# EAGLE board CT_schematic (EAGLE 7.6.0)

Size 100 x 80 mm. Coordinates in mm from the lower left corner, seen from the top.
Outline: 0,0 100,0 100,80 0,80 0,0
Copper layers (1*16): Top 0.035mm / dielectric 1.5mm / Bottom 0.035mm
Design rules "default": minimum track width 10mil, minimum drill 24mil, track to track 8mil, track to pad 8mil, pad to pad 8mil, via to via 8mil, smd to smd 8mil, copper to edge 40mil, drill to drill 8mil, minimum pad ring 10mil, minimum via ring 8mil, stop-mask expansion 4mil, vias tented up to drill 0mil, thermal gap 10mil

## Footprints (pad centres in the part's own frame; a part is rotated, then mirrored left to right if it is on the bottom)
C0603 = smd 0.8 x 0.8: 1 -0.762,0; 2 0.762,0
C0402 = smd 0.5 x 0.5: 1 -0.508,0; 2 0.508,0
C1210 = smd 1.2 x 2.5: 1 -1.524,0; 2 1.524,0
EXV-9H = smd 3.505 x 1.676: 1 -2.857,0; 2 2.857,0
L0603 = smd 0.8 x 0.8: 1 -0.762,0; 2 0.762,0
L1210 = smd 1.2 x 2.5: 1 -1.524,0; 2 1.524,0
PJ-037B_PACKAGE = drill 3.7 square: 1 12,0 | drill 3.2 square: 2 6,0
R0603 = smd 0.8 x 0.8: 1 -0.762,0; 2 0.762,0
UFBGA100 = smd 0.28 x 0.28: A1 -2.75,2.75; A2 -2.25,2.75; A3 -1.75,2.75; A4 -1.25,2.75; A5 -0.75,2.75; A6 -0.25,2.75; A7 0.25,2.75; A8 0.75,2.75; A9 1.25,2.75; A10 1.75,2.75; A11 2.25,2.75; A12 2.75,2.75; B1 -2.75,2.25; B2 -2.25,2.25; B3 -1.75,2.25; B4 -1.25,2.25; B5 -0.75,2.25; B6 -0.25,2.25; B7 0.25,2.25; B8 0.75,2.25; B9 1.25,2.25; B10 1.75,2.25; B11 2.25,2.25; B12 2.75,2.25; C1 -2.75,1.75; C2 -2.25,1.75; C3 -1.75,1.75; C4 -1.25,1.75; C5 -0.75,1.75; C8 0.75,1.75; C9 1.25,1.75; C10 1.75,1.75; C11 2.25,1.75; C12 2.75,1.75; D1 -2.75,1.25; D2 -2.25,1.25; D3 -1.75,1.25; D10 1.75,1.25; D11 2.25,1.25; D12 2.75,1.25; E1 -2.75,0.75; E2 -2.25,0.75; E3 -1.75,0.75; E10 1.75,0.75; E11 2.25,0.75; E12 2.75,0.75; F1 -2.75,0.25; F2 -2.25,0.25; F11 2.25,0.25; F12 2.75,0.25; G1 -2.75,-0.25; G2 -2.25,-0.25; G11 2.25,-0.25; G12 2.75,-0.25; H1 -2.75,-0.75; H2 -2.25,-0.75; H3 -1.75,-0.75; H10 1.75,-0.75; H11 2.25,-0.75; H12 2.75,-0.75; J1 -2.75,-1.25; J2 -2.25,-1.25; J3 -1.75,-1.25; J10 1.75,-1.25; J11 2.25,-1.25; J12 2.75,-1.25; K1 -2.75,-1.75; K2 -2.25,-1.75; K3 -1.75,-1.75; K4 -1.25,-1.75; K5 -0.75,-1.75; K8 0.75,-1.75; K9 1.25,-1.75; K10 1.75,-1.75; K11 2.25,-1.75; K12 2.75,-1.75; L1 -2.75,-2.25; L2 -2.25,-2.25; L3 -1.75,-2.25; L4 -1.25,-2.25; L5 -0.75,-2.25; L6 -0.25,-2.25; L7 0.25,-2.25; L8 0.75,-2.25; L9 1.25,-2.25; L10 1.75,-2.25; L11 2.25,-2.25; L12 2.75,-2.25; M1 -2.75,-2.75; M2 -2.25,-2.75; M3 -1.75,-2.75; M4 -1.25,-2.75; M5 -0.75,-2.75; M6 -0.25,-2.75; M7 0.25,-2.75; M8 0.75,-2.75; M9 1.25,-2.75; M10 1.75,-2.75; M11 2.25,-2.75; M12 2.75,-2.75
SAMTEC_FTSH-105-01-L-DV-K = smd 0.762 x 2.794: 1 -2.54,-2.032; 2 -2.54,2.032; 3 -1.27,-2.032; 4 -1.27,2.032; 5 0,-2.032; 6 0,2.032; 7 1.27,-2.032; 8 1.27,2.032; 9 2.54,-2.032; 10 2.54,2.032
SSOP-16 = smd 1.981 x 0.356: 1 -2.464,2.223; 2 -2.464,1.587; 3 -2.464,0.953; 4 -2.464,0.318; 5 -2.464,-0.318; 6 -2.464,-0.953; 7 -2.464,-1.587; 8 -2.464,-2.223; 9 2.464,-2.223; 10 2.464,-1.587; 11 2.464,-0.953; 12 2.464,-0.318; 13 2.464,0.318; 14 2.464,0.953; 15 2.464,1.587; 16 2.464,2.223
182-009-MALE = drill 1.194 pad 1.524 octagon: 1 -5.537,10.923; 2 -2.769,10.923; 3 0,10.923; 4 2.769,10.923; 5 5.537,10.923; 6 -4.153,8.08; 7 -1.384,8.08; 8 1.384,8.08; 9 4.153,8.08 | hole 3.048: -12.446,9.501; 12.446,9.501
TDFN-8/6MM = smd 0.3 x 0.75: 1 0,0; 2 0.5,0; 3 1,0; 4 1.5,0; 5 1.5,3; 6 1,3; 7 0.5,3; 8 0,3
TSSOP20-I = smd 0.4 x 1.35: 1 -2.925,-2.875; 2 -2.275,-2.875; 3 -1.625,-2.875; 4 -0.975,-2.875; 5 -0.325,-2.875; 6 0.325,-2.875; 7 0.975,-2.875; 8 1.625,-2.875; 9 2.275,-2.875; 10 2.925,-2.875; 11 2.925,2.875; 12 2.275,2.875; 13 1.625,2.875; 14 0.975,2.875; 15 0.325,2.875; 16 -0.325,2.875; 17 -0.975,2.875; 18 -1.625,2.875; 19 -2.275,2.875; 20 -2.925,2.875
ABS07-32.768KHZ-7-T = smd 1.1 x 2.4: 1 -2.5,0; 2 0,0
ASFL1 = smd 1.7 x 1.5: 1 -1.27,-1.1; 2 1.27,-1.1; 3 1.27,1.1; 4 -1.27,1.1
WSON-8 = smd 0.3 x 0.6: 1 -0.75,0; 2 0.05,0; 3 0.85,0; 4 1.65,0; 5 1.65,3.8; 6 0.85,3.8; 7 0.05,3.8; 8 -0.75,3.8 | smd 3 x 2.6: PAD 0.45,1.9
SON-6 = smd 0.55 x 0.3: 1 -0.355,0.5 | smd 0.52 x 0.3: 2 -0.37,0; 3 -0.37,-0.5; 4 0.37,-0.5; 5 0.37,0; 6 0.37,0.5
SW_4-1437565-2 = smd 1.4 x 2.1: 1 -2.23,4.55; 2 -2.23,-4.55; 3 2.23,4.55; 4 2.23,-4.55
LGM67K-G1J2-24-Z = smd 0.8 x 1.4: A -2,0; C 0,0
NC7SZ125M5X = smd 1.3 x 0.7: 1 -1.3,0.95; 2 -1.3,0; 3 -1.3,-0.95; 4 1.3,-0.95; 5 1.3,0.95

## Placement (x,y rotation side)
C1  1e-07  [C0603]  -26.67,86.36 0 top  (outside the outline)
C2  1e-07  [C0603]  -30.48,86.36 0 top  (outside the outline)
C3  1e-07  [C0603]  -34.29,86.36 0 top  (outside the outline)
C4  1e-07  [C0603]  -38.1,86.36 0 top  (outside the outline)
C5  1e-07  [C0603]  -41.91,86.36 0 top  (outside the outline)
C6  4.7e-06  [C0603]  -19.05,86.36 0 top  (outside the outline)
C7  1e-07  [C0603]  -45.72,86.36 0 top  (outside the outline)
C8  1e-08  [C0603]  -49.53,86.36 0 top  (outside the outline)
C9  1e-06  [C0603]  -53.34,86.36 0 top  (outside the outline)
C10  1e-11  [C0402]  -38.1,91.44 0 top  (outside the outline)
C11  1e-11  [C0402]  -41.91,91.44 0 top  (outside the outline)
C12  1e-07  [C0402]  -45.72,91.44 0 top  (outside the outline)
C13  1e-06  [C0603]  -57.15,86.36 0 top  (outside the outline)
C14  1e-06  [C0603]  -60.96,86.36 0 top  (outside the outline)
C15  2.2e-07  [C0603]  -22.86,86.36 0 top  (outside the outline)
C16  1e-06  [C0603]  -64.77,86.36 0 top  (outside the outline)
C17  1e-06  [C0603]  -68.58,86.36 0 top  (outside the outline)
C18  1e-08  [C0402]  -49.53,91.44 0 top  (outside the outline)
C19  1e-07  [C0402]  -53.34,91.44 0 top  (outside the outline)
C20  1e-07  [C0402]  -57.15,91.44 0 top  (outside the outline)
C21  1e-07  [C0402]  -60.96,91.44 0 top  (outside the outline)
C22  1e-07  [C0402]  -64.77,91.44 0 top  (outside the outline)
C23  1e-07  [C0402]  -68.58,91.44 0 top  (outside the outline)
C24  1e-07  [C0402]  -72.39,91.44 0 top  (outside the outline)
C25  1e-08  [C0402]  -76.2,91.44 0 top  (outside the outline)
C26  1e-08  [C0402]  -80.01,91.44 0 top  (outside the outline)
C27  1e-05  [C1210]  -71.12,72.39 0 top  (outside the outline)
C28  1e-05  [C1210]  -77.47,72.39 0 top  (outside the outline)
C29  1e-07  [C0402]  -83.82,91.44 0 top  (outside the outline)
C30  0.0001  [EXV-9H]  -17.78,73.66 0 top  (outside the outline)
C31  0.0001  [EXV-9H]  -29.21,73.66 0 top  (outside the outline)
C32  1e-08  [C0402]  -15.24,96.52 0 top  (outside the outline)
C33  1e-08  [C0402]  -19.05,96.52 0 top  (outside the outline)
F1  240.0  [L0603]  -72.39,86.36 0 top  (outside the outline)
I1  1e-05  [L1210]  -16.51,81.28 0 top  (outside the outline)
J1  PJ-037B  [PJ-037B_PACKAGE]  -27.94,50.8 0 top  (outside the outline)
R2  1000.0  [R0603]  -76.2,86.36 0 top  (outside the outline)
R4  4700.0  [R0603]  -80.01,86.36 0 top  (outside the outline)
R5  2200.0  [R0603]  -15.24,91.44 0 top  (outside the outline)
R6  2200.0  [R0603]  -19.05,91.44 0 top  (outside the outline)
R7  10000.0  [R0603]  -54.61,80.01 0 top  (outside the outline)
R8  10000.0  [R0603]  -59.69,80.01 0 top  (outside the outline)
R9  10000.0  [R0603]  -64.77,80.01 0 top  (outside the outline)
R10  10000.0  [R0603]  -69.85,80.01 0 top  (outside the outline)
R11  10000.0  [R0603]  -74.93,80.01 0 top  (outside the outline)
R12  5.0  [R0603]  -22.86,91.44 0 top  (outside the outline)
R13  100000.0  [R0603]  -34.29,80.01 0 top  (outside the outline)
R14  100000.0  [R0603]  -39.37,80.01 0 top  (outside the outline)
R15  2231.0  [R0603]  -26.67,91.44 0 top  (outside the outline)
R16  1000.0  [R0603]  -30.48,91.44 0 top  (outside the outline)
R17  10000.0  [R0603]  -80.01,80.01 0 top  (outside the outline)
R18  10000.0  [R0603]  -15.24,86.36 0 top  (outside the outline)
R19  9100.0  [R0603]  -34.29,91.44 0 top  (outside the outline)
R20  680000.0  [R0603]  -44.45,80.01 0 top  (outside the outline)
R21  120000.0  [R0603]  -49.53,80.01 0 top  (outside the outline)
U1  STM32L152V8H6A  [UFBGA100]  -62.23,49.53 0 top  (outside the outline)
U2  FTSH-105-01-L-DV-K  [SAMTEC_FTSH-105-01-L-DV-K]  -76.2,30.48 0 top  (outside the outline)
U3  LTC2804CGN-1#PBF  [SSOP-16]  -29.21,63.5 0 top  (outside the outline)
U4  182-009-113R531  [182-009-MALE]  -36.83,6.35 0 top  (outside the outline)
U5  24AA16-I/MC  [TDFN-8/6MM]  -41.91,62.23 0 top  (outside the outline)
U6  SP3203ECY-L/TR  [TSSOP20-I]  -77.47,49.53 0 top  (outside the outline)
U7  182-009-113R531  [182-009-MALE]  -36.83,27.94 0 top  (outside the outline)
U8  ABS07-32.768KHZ-7-T  [ABS07-32.768KHZ-7-T]  -50.8,72.39 0 top  (outside the outline)
U9  ASFL1-25MHZ-NCS  [ASFL1]  -78.74,62.23 0 top  (outside the outline)
U10  LP3878SDX-ADJ/NOPB  [WSON-8]  -62.23,60.96 0 top  (outside the outline)
U11  TPS3895ADRYR  [SON-6]  -21.59,95.25 0 top  (outside the outline)
U12  4-1437565-2  [SW_4-1437565-2]  -44.45,49.53 0 top  (outside the outline)
U13  Q65110A2395  [LGM67K-G1J2-24-Z]  -59.69,72.39 0 top  (outside the outline)
U14  nc7sz125m5x  [NC7SZ125M5X]  -21.59,80.01 0 top  (outside the outline)
U15  nc7sz125m5x  [NC7SZ125M5X]  -27.94,80.01 0 top  (outside the outline)

## Library data of the parts
C1-C33 F1 I1 J1 R2 R4-R21 U1-U15 = circuit_tree

## Nets
CLK_CRYSTAL_U1_D1: C10.1 U1.D1 U8.1
CLK_CRYSTAL_U1_E1: C11.1 U1.E1 U8.2
CLK_U1_F1: U1.F1 U9.3
GND: C1.2 C2.2 C3.2 C4.2 C5.2 C6.2 C7.2 C8.2 C9.2 C10.2 C11.2 C12.2 C13.2 C14.2 C16.2 C17.2 C18.2 C19.2 C20.2 C23.2 C24.2 C25.2 C26.2 C27.2 C28.2 C29.2 C30.2 C31.2 C32.2 C33.2 J1.2 R2.2 R7.2 R11.2 R12.2 R16.2 R19.2 R21.2 U1.D3 U1.E3 U1.F2 U1.F11 U1.F12 U1.J1 U1.K1 U2.3 U2.5 U3.8 U4.5 U5.4 U5.7 U6.18 U7.5 U9.2 U10.3 U10.PAD U11.2 U13.C U14.2 U14.3 U15.1 U15.3
NET_U1_A3: R5.1 U1.A3 U5.6
NET_U1_A4: R7.1 U1.A4
NET_U1_B3: R6.1 U1.B3 U5.5
NET_U1_E2: C7.1 U1.E2
NET_U1_H2: R4.1 U1.H2 U15.4
NET_U1_M1: C8.1 C9.1 F1.1 U1.L1 U1.M1
NET_U1_M11: U13.A
NET_U1_M12: U12.3 U12.4
NET_U2_9: R12.1 U2.9
NET_U3_6: C13.1 U3.6
NET_U3_7: C15.1 I1.2 U3.7
NET_U3_9: C14.1 U3.9
NET_U3_10: C15.2 U3.10
NET_U3_11: R13.1 U3.11
NET_U4_2: U3.1 U4.2
NET_U4_3: U3.3 U4.3
NET_U4_7: U3.2 U4.7
NET_U4_8: U3.4 U4.8
NET_U6_1: C21.1 U6.1
NET_U6_2: C23.1 U6.2
NET_U6_3: C21.2 U6.3
NET_U6_4: C22.1 U6.4
NET_U6_5: C22.2 U6.5
NET_U6_6: C24.1 U6.6
NET_U6_20: U6.20
NET_U7_2: U6.14 U7.2
NET_U7_3: U6.17 U7.3
NET_U7_7: U6.13 U7.7
NET_U7_8: U6.16 U7.8
NET_U10_1: C26.1 U10.1
NET_U10_6: R15.2 R16.1 U10.6
NET_U10_8: R14.1 U10.8
NET_U11_1: R18.1 R19.1 U11.1
NET_U11_3: R20.2 R21.1 U11.3
NET_U11_4: R17.1 U11.4 U14.4 U15.2
NET_U12_1: R2.1 U12.1 U12.2
PROC_SYS_JTCK_SWCLK: R11.1 U1.A10 U2.4
PROC_SYS_JTDI: R9.1 U1.A9 U2.8
PROC_SYS_JTDO_TRACESWO: U1.A8 U2.6
PROC_SYS_JTMS_SWDIO: R10.1 U1.A11 U2.2
PROC_USART1_CTS: U1.B12 U6.8
PROC_USART1_RTS: U1.A12 U6.10
PROC_USART1_RX: U1.B4 U6.11
PROC_USART1_TX: U1.B5 U6.7
PROC_USART2_CTS: U1.B8 U3.13
PROC_USART2_RTS: U1.B7 U3.15
PROC_USART2_RX: U1.B6 U3.16
PROC_USART2_TX: U1.A6 U3.14
RST_OUT_U2_JTAG_RST_B: R8.1 U2.10 U14.1
VCC_S1_14V2: C27.1 C30.1 C31.1 J1.1 R14.2 U10.4
VCC_TIER1_3V3: C1.1 C2.1 C3.1 C4.1 C5.1 C6.1 C12.1 C16.1 C17.1 C18.1 C19.1 C20.1 C25.1 C28.1 C29.1 C32.1 C33.1 F1.2 I1.1 R4.2 R5.2 R6.2 R8.2 R9.2 R10.2 R13.2 R15.1 R17.2 R18.2 R20.1 U1.C4 U1.G2 U1.G11 U1.G12 U1.H3 U2.1 U3.5 U3.12 U5.8 U6.12 U6.19 U9.4 U10.5 U11.6 U14.5 U15.5

## Tracks (layer width: path | path; a pad name or v marks a point on that pad's centre or on a via)
CLK_CRYSTAL_U1_D1  (2 unrouted)
CLK_CRYSTAL_U1_E1  (2 unrouted)
CLK_U1_F1  (1 unrouted)
GND  (61 unrouted)
NET_U1_A3  (2 unrouted)
NET_U1_A4  (1 unrouted)
NET_U1_B3  (2 unrouted)
NET_U1_E2  (1 unrouted)
NET_U1_H2  (2 unrouted)
NET_U1_M1  (4 unrouted)
NET_U1_M12  (1 unrouted)
NET_U2_9  (1 unrouted)
NET_U3_6  (1 unrouted)
NET_U3_7  (2 unrouted)
NET_U3_9  (1 unrouted)
NET_U3_10  (1 unrouted)
NET_U3_11  (1 unrouted)
NET_U4_2  (1 unrouted)
NET_U4_3  (1 unrouted)
NET_U4_7  (1 unrouted)
NET_U4_8  (1 unrouted)
NET_U6_1  (1 unrouted)
NET_U6_2  (1 unrouted)
NET_U6_3  (1 unrouted)
NET_U6_4  (1 unrouted)
NET_U6_5  (1 unrouted)
NET_U6_6  (1 unrouted)
NET_U7_2  (1 unrouted)
NET_U7_3  (1 unrouted)
NET_U7_7  (1 unrouted)
NET_U7_8  (1 unrouted)
NET_U10_1  (1 unrouted)
NET_U10_6  (2 unrouted)
NET_U10_8  (1 unrouted)
NET_U11_1  (2 unrouted)
NET_U11_3  (2 unrouted)
NET_U11_4  (3 unrouted)
NET_U12_1  (2 unrouted)
PROC_SYS_JTCK_SWCLK  (2 unrouted)
PROC_SYS_JTDI  (2 unrouted)
PROC_SYS_JTDO_TRACESWO  (1 unrouted)
PROC_SYS_JTMS_SWDIO  (2 unrouted)
PROC_USART1_CTS  (1 unrouted)
PROC_USART1_RTS  (1 unrouted)
PROC_USART1_RX  (1 unrouted)
PROC_USART1_TX  (1 unrouted)
PROC_USART2_CTS  (1 unrouted)
PROC_USART2_RTS  (1 unrouted)
PROC_USART2_RX  (1 unrouted)
PROC_USART2_TX  (1 unrouted)
RST_OUT_U2_JTAG_RST_B  (2 unrouted)
VCC_S1_14V2  (5 unrouted)
VCC_TIER1_3V3  (45 unrouted)